# Altium PCB PCB_RP2040.pcbdoc
Units mil, origin at the board's own origin, x right, y up, seen from the top; angles counter-clockwise.
Board outline 2663.55 x 1404.85 mil, 2 copper layers (Top Layer, Bottom Layer); 51 components, 59 nets, 229 pads, 50 vias.
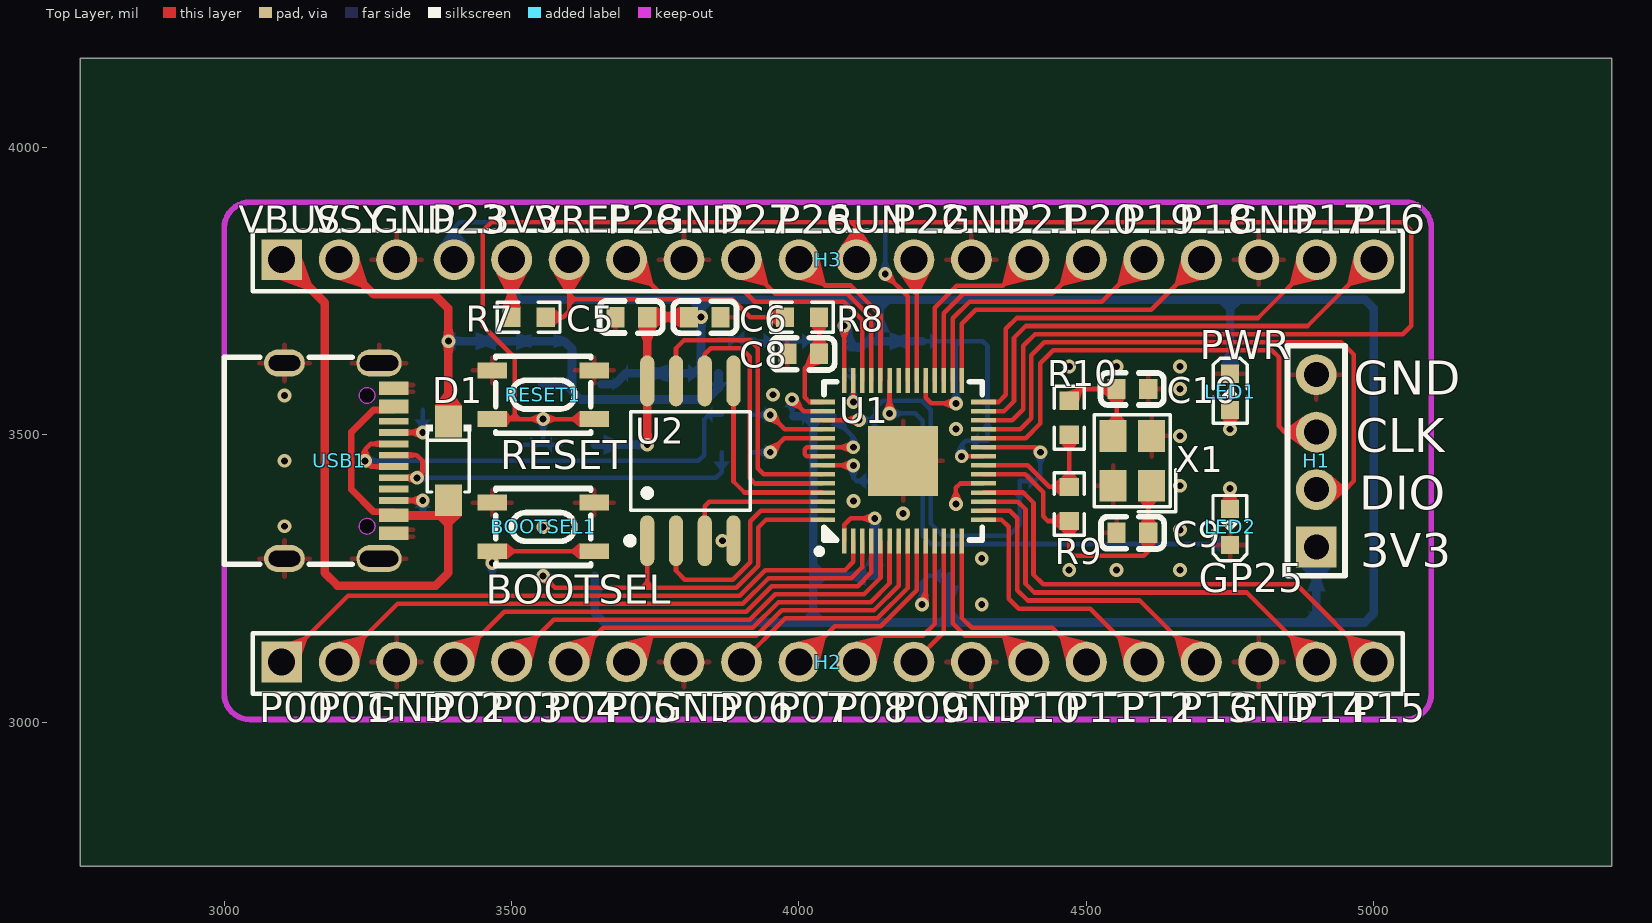
[diagram p0: Top Layer view]
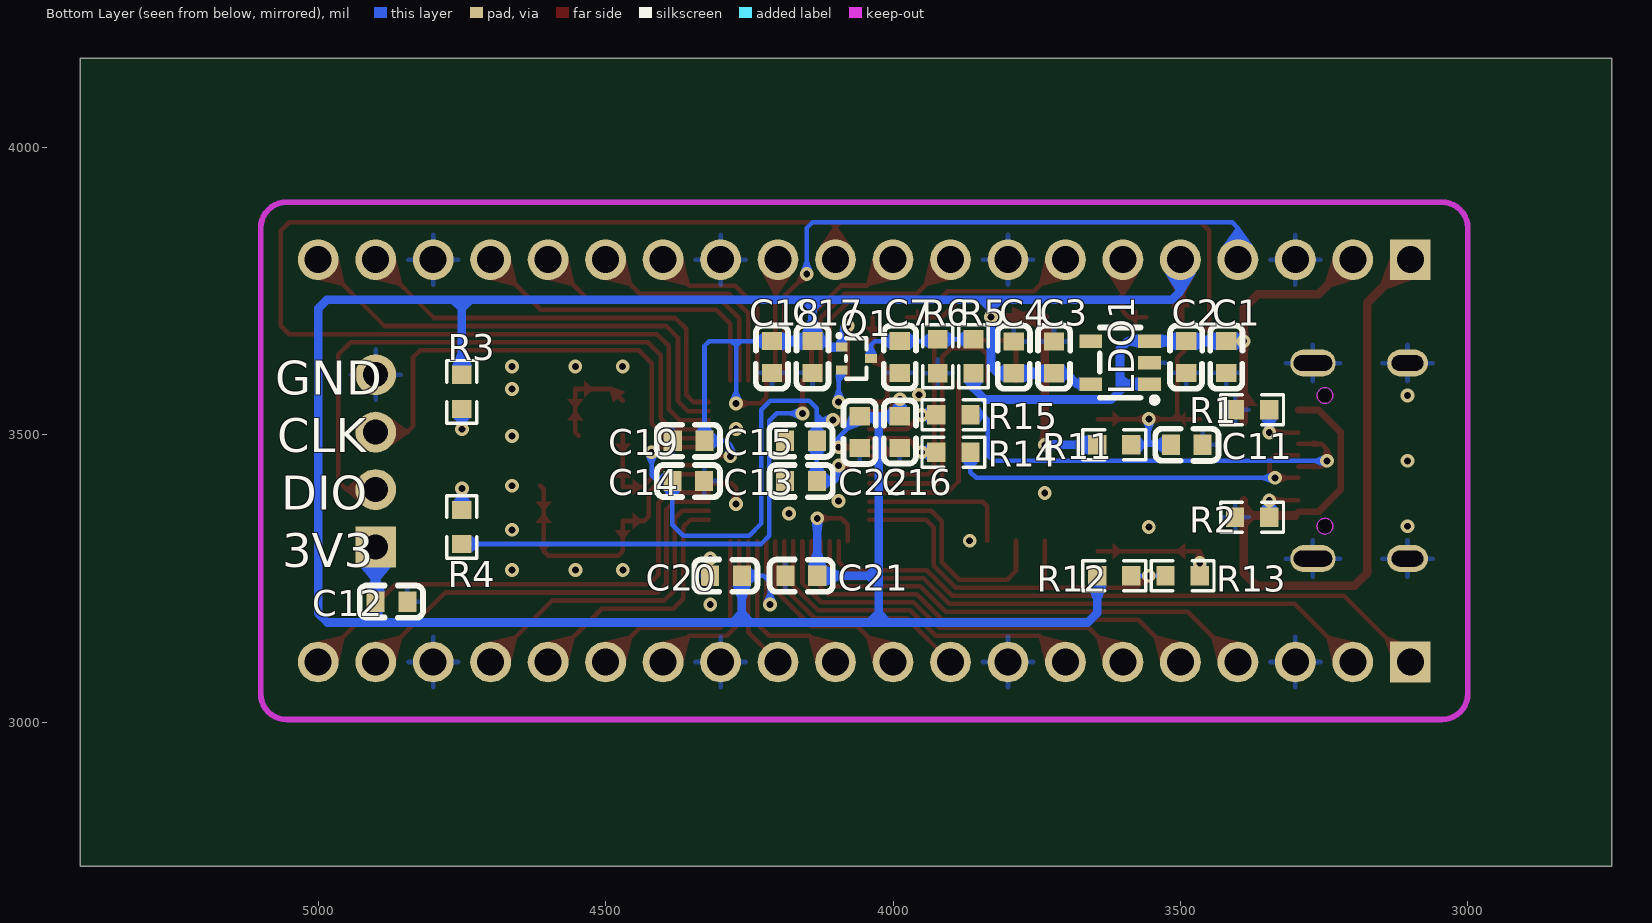
[diagram p1: Bottom Layer view, seen from below]

## Layer stack, top to bottom
Top Layer: signal copper (thickness not stored)
Dielectric: dielectric 12.6, FR-4, Dk 4.8
Bottom Layer: signal copper (thickness not stored)

## Board outline
5413.55,2750 2750,2750 2750,4154.85 5413.55,4154.85

## Design rules (kind name [scope] priority, off if disabled: settings)
BoardOutlineClearance safeClearance [All] p0: genericclearance=10 ignorepadtopadclearanceinfootprint=FALSE except(0: Arc-SplitContinuation Track-SplitContinuation SMDPad-SplitContinuation THPad-SplitContinuation Via-SplitContinuation Fill-SplitContinuation Poly-SplitContinuation Region-SplitContinuation Text-SplitContinuation; 6: Track-CutoutEdge SMDPad-CutoutEdge THPad-CutoutEdge Via-CutoutEdge Fill-CutoutEdge Region-CutoutEdge; 11.8: Track-OutlineEdge SMDPad-OutlineEdge THPad-OutlineEdge Via-OutlineEdge Fill-OutlineEdge Region-OutlineEdge Poly-OutlineEdge Text-OutlineEdge)
Clearance safeClearance [(InNet('3V3') OR InNet('GPIO0') OR InNet('GPIO1') OR InNet('GPIO2') OR InNet('GPIO3') OR InNet('GPIO4') OR InNet('GPIO5') OR InNet('GPIO6') OR InNet('GPIO7') OR InNet('GPIO8') OR InNet('GPIO9') OR InNet('GPIO10') OR InNet('GPIO11') OR InNet('GPIO12') OR InNet('GPIO13') OR InNet('GPIO14') OR InNet('GPIO15') OR InNet('GND') OR InNet('XIN') OR InNet('XOUT') OR InNet('1V1') OR InNet('SWCLK') OR InNet('RUN') OR InNet('GPIO16') OR InNet('GPIO17') OR InNet('GPIO18') OR InNet('GPIO19') OR InNet('GPIO20') OR InNet('GPIO21') OR InNet('GPIO22') OR InNet('GPIO23') OR InNet('GPIO24') OR InNet('GPIO25') OR InNet('GPIO26_ADC0') OR InNet('GPIO27_ADC1') OR InNet('GPIO28_ADC2') OR InNet('GPIO29_ADC3') OR InNet('QSPI_SD3') OR InNet('QSPI_SCLK') OR InNet('QSPI_SD0') OR InNet('QSPI_SD2') OR InNet('QSPI_SD1') OR InNet('QSPI_SS') OR InNet('ADC_VREF') OR InNet('VSYS') OR InNet('VBUS') OR InNet('SWDIO') OR InNet('ADC_AVDD') OR InNet('$1N7808') OR InNet('$1N27491') OR InNet('$1N12428') OR InNet('$1N4514') OR InNet('$1N30099') OR InNet('$1N43649') OR InNet('$1N43452') OR InNet('USB_DN') OR InNet('USB_DP') OR InNet('CC1') OR InNet('CC2'))] p1: gap=7 ignorepadtopadclearanceinfootprint=FALSE except(6: Track-Track Track-SMDPad SMDPad-SMDPad Track-THPad SMDPad-THPad THPad-THPad Track-Via SMDPad-Via THPad-Via Via-Via Track-Fill SMDPad-Fill THPad-Fill Via-Fill Fill-Fill Track-Region SMDPad-Region THPad-Region Via-Region Fill-Region Region-Region Track-Poly SMDPad-Poly THPad-Poly Via-Poly Fill-Poly Region-Poly Poly-Poly Track-Text SMDPad-Text THPad-Text Via-Text Fill-Text Region-Text Poly-Text Text-Text Track-Hole SMDPad-Hole THPad-Hole Via-Hole Fill-Hole Region-Hole Poly-Hole Text-Hole; 11.8: Track-Sheet SMDPad-Sheet THPad-Sheet Via-Sheet Fill-Sheet Region-Sheet Poly-Sheet Text-Sheet Sheet-Hole)
DiffPairsRouting differentialPair [All] p1: maxuncoupledlength=10 minlimit=6 maxlimit=6 mostfreqgap=6 toplayer_minwidth=5 toplayer_prefwidth=10 toplayer_maxwidth=100 bottomlayer_minwidth=5 bottomlayer_prefwidth=10 bottomlayer_maxwidth=100
PasteMaskExpansion pasteMaskExpansion [All] p1: expansion=0
PlaneConnect innerPlane [All] p1: planeconnectstyle=Relief reliefexpansion=20 reliefentries=4 reliefconductorwidth=10 reliefairgap=10
PolygonConnect copperRegion [All] p1: connectstyle=Relief reliefentries=4 reliefconductorwidth=8 polygonreliefangle="90 Angle" airgapwidth=8
RoutingVias viaSize [All] p1: viastyle="Through Hole" holewidth=12.0078 minholewidth=11.811 maxholewidth=236.2204 width=24.0158 minwidth=19.685 maxwidth=393.7008
SolderMaskExpansion solderMaskExpansion [All] p1: useseparateexpansions=TRUE expansion=2 expansionbottom=2
Width trackWidth [All] p1: maxlimit=100 minlimit=5 preferedwidth=10

## Components (designator, comment, footprint, x,y, rotation, side; value= is the part's Value field where it differs from the comment)
BOOTSEL1 "PTS815SJK250SMTRLFS" SW-SMD_4P-L4.2-W3.3-P2.15-LS5.1 3555,3339.85 r0 top
C1 "CL10A225KO8NNNC" C0603 3420,3635.46 r90 bottom
C2 "0603B104K500NT" C0603 3490,3635.46 r90 bottom
C3 "CL10A225KO8NNNC" C0603 3720,3634.85 r270 bottom
C4 "0603B104K500NT" C0603 3790,3634.85 r270 bottom
C5 "0603B104K500NT" C0603 3708.4,3704.85 r0 top
C6 "CL10A225KO8NNNC" C0603 3836,3704.85 r180 top
C7 "0603B104K500NT" C0603 3988,3635.46 r90 bottom
C8 "CL10A225KO8NNNC" C0603 4007.4,3640.85 r0 top
C9 "CC0603JRNPO9BN150" C0603 4580,3329.85 r180 top
C10 "CC0603JRNPO9BN150" C0603 4580,3579.85 r0 top
C11 "0603B104K500NT" C0603 3488.91,3482.85 r0 bottom
C12 "0603B104K500NT" C0603 4872.4,3209.85 r180 bottom
C13 "0603B104K500NT" C0603 4160,3419.85 r0 bottom
C14 "0603B104K500NT" C0603 4356.17,3419.85 r0 bottom
C15 "CL10A225KO8NNNC" C0603 4160,3489.64 r180 bottom
C16 "CL10A225KO8NNNC" C0603 3988,3504.85 r270 bottom
C17 "0603B104K500NT" C0603 4140,3635.46 r90 bottom
C18 "0603B104K500NT" C0603 4210.5,3635.46 r90 bottom
C19 "0603B104K500NT" C0603 4355.56,3489.64 r180 bottom
C20 "0603B104K500NT" C0603 4290.56,3254.85 r180 bottom
C21 "0603B104K500NT" C0603 4159.39,3254.85 r180 bottom
C22 "0603B104K500NT" C0603 4058,3504.85 r90 bottom
D1 "1N4007W_C108803" SOD-123FL_L2.7-W1.8-LS3.8-RD 3390,3454.85 r270 top
H1 "DZ254W-11-04-65" hdr-th_4p-p2.54-h-m-w10.3 4900,3454.85 r90 top
H2 "12251120CNG0S115005" HDR-TH_20P-P2.54-V-M-1 4050,3104.85 r0 top
H3 "12251120CNG0S115005" HDR-TH_20P-P2.54-V-M-1 4050,3804.85 r0 top
LDO1 "ME6211C33M5G-N" SOT-23-5_L3.0-W1.7-P0.95-LS2.8-BR 3605,3625.65 r180 bottom
LED1 "NCD0603R1_C84263" LED0603-RD_RED 4750,3574.85 r270 top
LED2 "19-217/BHC-ZL1M2RY/3T" led0603-r-rd_blue 4750,3339.85 r90 top
Q1 "DMG1012T-7" SOT-523-3_L1.6-W0.8-P1.00-LS1.6-BR 4063.9,3632.85 r0 bottom
R1 "RC0603FR-075K1L" R0603 3375.2,3543.43 r180 bottom
R2 "RC0603FR-075K1L" R0603 3375.2,3356.42 r180 bottom
R3 "RC0603FR-071KL" R0603 4750,3574.85 r90 bottom
R4 "RC0603FR-07470RL" R0603 4750,3339.85 r270 bottom
R5 "RC0603FR-07200KL" R0603 3860,3636.75 r270 bottom
R6 "RC0603FR-07100KL" R0603 3922.03,3636.75 r90 bottom
R7 "RC0603FR-07200RL" R0603 3529.7,3704.85 r180 top
R8 "RC0603FR-071RL" R0603 4005.3,3704.85 r180 top
R9 "RC0603FR-071KL" R0603 4470,3379.85 r90 top
R10 "RC0603FR-071KL" R0603 4470,3529.85 r270 top
R11 "0603WAF1002T5E" R0603 3615,3482.85 r0 bottom
R12 "RC0603FR-071KL" R0603 3615,3254.85 r180 bottom
R13 "RC0603FR-071KL" R0603 3496.1,3254.85 r0 bottom
R14 "0603WAF270JT5E" R0603 3895,3469.85 r180 bottom
R15 "0603WAF270JT5E" R0603 3895,3534.85 r180 bottom
RESET1 "PTS815SJK250SMTRLFS" SW-SMD_4P-L4.2-W3.3-P2.15-LS5.1 3555,3569.85 r0 top
U1 "RP2040_C2040" LQFN-56_L7.0-W7.0-P0.4-EP 4181.11,3454.85 r90 top locked
U2 "W25Q128JVSIQ" SOIC-8_L5.3-W5.3-P1.27-LS8.0-BL 3811.03,3454.85 r0 top
USB1 "KH-TYPE-C-16P" USB-C-SMD_KH-TYPE-C-16P 3200,3454.85 r270 top
X1 "XC32M4-12.000-F10NNFT" CRYSTAL-SMD_4P-L3.2-W2.5-BL 4580,3454.85 r90 top

## Footprints (in the part's own frame and the unit in brackets; to place one, negate y for a bottom-side part, rotate by r counter-clockwise, add the part's x,y. Pads: shape width x height; smd on the part's side, far side on the other; paste and mask are expansions set on the pad)
C0603 [mm]
  rect 0.8x0.9 smd: 1(-0.7,0) 2(0.7,0)
  silkscreen extent -1.41,-0.71 1.39,0.72
CRYSTAL-SMD_4P-L3.2-W2.5-BL [mm]
  rect 1.4x1.2 smd: 1(-1.1,-0.85) 2(1.1,-0.85) 3(1.1,0.85) 4(-1.1,0.85)
  silkscreen extent -2.26,-1.91 2.03,1.68
hdr-th_4p-p2.54-h-m-w10.3 [mm]
  rect 1.8x1.8 hole 1.1: 1(-3.81,0)
  round 1.8 hole 1.1: 2(-1.27,0) 3(1.27,0) 4(3.81,0)
  silkscreen extent -5.08,-1.27 5.08,1.27
HDR-TH_20P-P2.54-V-M-1 [mil]
  rect 70.9x70.9 hole 47.2: 1(-950,0)
  round 70.9 hole 47.2: 2(-850,0) 3(-750,0) 4(-650,0) 5(-550,0) 6(-450,0) 7(-350,0) 8(-250,0) 9(-150,0) 10(-50,0) 11(50,0) 12(150,0) 13(250,0) 14(350,0) 15(450,0) 16(550,0) 17(650,0) 18(750,0) 19(850,0) 20(950,0)
  silkscreen extent -1000,-55 1000,50
led0603-r-rd_blue [mm]
  rect 0.8x0.8 smd: 1(-0.8,-0.003) 2(0.8,0.003)
  silkscreen extent -1.49,-0.75 1.39,0.76
LED0603-RD_RED [mm]
  rect 0.8x0.8 smd: 1(-0.8,-0.003) 2(0.8,0.003)
  silkscreen extent -1.49,-0.75 1.39,0.76
LQFN-56_L7.0-W7.0-P0.4-EP [mm]
  rect 1.1x0.2 smd: 1(-3.55,2.6) 2(-3.55,2.2) 3(-3.55,1.8) 4(-3.55,1.4) 5(-3.55,1) 6(-3.55,0.6) 7(-3.55,0.2) 8(-3.55,-0.2) 9(-3.55,-0.6) 10(-3.55,-1) 11(-3.55,-1.4) 12(-3.55,-1.8) 13(-3.55,-2.2) 14(-3.55,-2.6) 29(3.55,-2.6) 30(3.55,-2.2) 31(3.55,-1.8) 32(3.55,-1.4) 33(3.55,-1) 34(3.55,-0.6) 35(3.55,-0.2) 36(3.55,0.2) 37(3.55,0.6) 38(3.55,1) 39(3.55,1.4) 40(3.55,1.8) 41(3.55,2.2) 42(3.55,2.6)
  rect 0.2x1.1 smd: 15(-2.6,-3.55) 16(-2.2,-3.55) 17(-1.8,-3.55) 18(-1.4,-3.55) 19(-1,-3.55) 20(-0.6,-3.55) 21(-0.2,-3.55) 22(0.2,-3.55) 23(0.6,-3.55) 24(1,-3.55) 25(1.4,-3.55) 26(1.8,-3.55) 27(2.2,-3.55) 28(2.6,-3.55) 43(2.6,3.55) 44(2.2,3.55) 45(1.8,3.55) 46(1.4,3.55) 47(1,3.55) 48(0.6,3.55) 49(0.2,3.55) 50(-0.2,3.55) 51(-0.6,3.55) 52(-1,3.55) 53(-1.4,3.55) 54(-1.8,3.55) 55(-2.2,3.55) 56(-2.6,3.55)
  rect 3.1x3.1 smd: 57(0,0)
  silkscreen extent -4.13,-3.5 3.5,3.83
R0603 [mil]
  rect 31.75x34.02 smd: 1(-29.66,0) 2(29.66,0)
  silkscreen extent -55,-26 55,26
SOD-123FL_L2.7-W1.8-LS3.8-RD [mil]
  rect 55.1x47.2 smd: 1(-68.3,0) 2(68.3,0)
  silkscreen extent -63,-40 54,39
SOIC-8_L5.3-W5.3-P1.27-LS8.0-BL [mm]
  oval 0.63x2.25 smd: 1(-1.905,-3.53) 2(-0.635,-3.53) 3(0.635,-3.53) 4(1.905,-3.53) 5(1.905,3.53) 6(0.635,3.53) 7(-0.635,3.53) 8(-1.905,3.53)
  silkscreen extent -2.82,-3.68 2.64,2.18
SOT-23-5_L3.0-W1.7-P0.95-LS2.8-BR [mm]
  rect 1x0.6 smd: 1(1.3,-0.95) 2(1.3,0) 3(1.3,0.95) 4(-1.3,0.95) 5(-1.3,-0.95)
  silkscreen extent -0.9,-1.78 1.65,1.55
SOT-523-3_L1.6-W0.8-P1.00-LS1.6-BR [mm]
  rect 0.51x0.4 smd: 1(0.65,-0.5) 2(0.65,0.5) 3(-0.65,0)
  silkscreen extent -0.45,-1.08 0.83,0.9
SW-SMD_4P-L4.2-W3.3-P2.15-LS5.1 [mil]
  rect 51.2x27.6 smd: 1(-88.6,42.3) 2(88.6,42.3) 3(-88.6,-42.3) 4(88.6,-42.3)
  silkscreen extent -83,-67 83,67
USB-C-SMD_KH-TYPE-C-16P [mm]
  oval 1.2x2 hole 0.7 slot 1.7 at 90 deg: 1(-4.32,1.765) 2(4.32,1.765)
  oval 1.2x1.8 hole 0.7 slot 1.4 at 90 deg: 3(-4.32,-2.415) 4(4.32,-2.415)
  rect 0.3x1.3 smd: A1(-3.35,2.415) A4(-2.55,2.415) A5(-1.25,2.415) A6(-0.25,2.415) A7(0.25,2.415) A8(1.25,2.415) A9(2.55,2.415) A12(3.35,2.415) B1(3.05,2.415) B4(2.25,2.415) B5(1.75,2.415) B6(0.75,2.415) B7(-0.75,2.415) B8(-1.75,2.415) B9(-2.25,2.415) B12(-3.05,2.415)
  Board Outline Layer circle w0.005: c-2.89,1.235 r0.35
  Board Outline Layer circle w0.005: c2.89,1.235 r0.35
  Board Outline Layer region: -2.89,1.585 -2.738,1.55 -2.616,1.453 -2.549,1.313 -2.549,1.157 -2.616,1.017 -2.738,0.92 -2.89,0.885 -2.89,0.885 -3.042,0.92 -3.164,1.017 -3.231,1.157 -3.231,1.313 -3.164,1.453 -3.042,1.55 -2.89,1.585
  Board Outline Layer region: 2.89,1.585 3.042,1.55 3.164,1.453 3.231,1.313 3.231,1.157 3.164,1.017 3.042,0.92 2.89,0.885 2.89,0.885 2.738,0.92 2.616,1.017 2.549,1.157 2.549,1.313 2.616,1.453 2.738,1.55 2.89,1.585
  Multi-Layer board cut-out: -2.89,1.585 -2.738,1.55 -2.616,1.453 -2.549,1.313 -2.549,1.157 -2.616,1.017 -2.738,0.92 -2.89,0.885 -2.89,0.885 -3.042,0.92 -3.164,1.017 -3.231,1.157 -3.231,1.313 -3.164,1.453 -3.042,1.55 -2.89,1.585
  Multi-Layer board cut-out: 2.89,1.585 3.042,1.55 3.164,1.453 3.231,1.313 3.231,1.157 3.164,1.017 3.042,0.92 2.89,0.885 2.89,0.885 2.738,0.92 2.616,1.017 2.549,1.157 2.549,1.313 2.616,1.453 2.738,1.55 2.89,1.585
  silkscreen extent -4.57,-5.08 4.57,0.57

## Via types
v1: diameter 24.02, hole 12.01, Top Layer to Bottom Layer, 50 vias

## Nets (pads, with @x,y where several pads share a name; then routed paths per layer and width w, separated by ;. In a path a pad name is that pad's centre, name@x,y a point inside that pad or via, vN(x,y) a via of type N, cw(c..) or ccw(c..) an arc to the next point about the centre after c; other vN are vias at no path point)
1V1: C13.1 C14.2 C15.2 U1.23 U1.45 U1.50 | length 1076
  Top Layer w8: U1.50 v1@4094.47,3446.97 ; U1.45@4041.38,3525.75 v1(4104.49,3525.75) ; U1.23 4411.38,3478.47 v1(4420,3469.85)
  Bottom Layer w8: v1(4094.49,3446.95) 4094.49,3425.36 4100,3419.85 C13.1@4122.44,3419.85 ; v1(4104.49,3525.75) 4123.34,3525.75 ; C13.1 C15.2 4132.44,3516.65 ; v1(4420,3469.85) 4420,3429.85 4410,3419.85 C14.2 4383.73,3343.57 4365,3324.85 4250,3324.85 4229,3345.86 4229,3543.86 4213.47,3559.38 4145.66,3559.38 4132.44,3546.16 4132.44,3534.85 ; 4123.34,3525.75 4132.44,3534.85 ; 4123.34,3525.75 4132.44,3516.65 ; 4132.44,3516.65 4132.44,3534.85
3V3: C3.2 C4.2 C5.2 C6.2 C12.1 C16.1 C17.2 C18.2 C19.2 C20.2 C21.2 C22.2 H1.1 H3.5 LDO1.5 Q1.1 R3.2 R7.2 R11.2 R12.1 U1.1 U1.10 U1.22 U1.33 U1.42 U1.44 U1.48 U1.49 U2.8 | length 7030.2
  Top Layer w8: v1(3988,3561.94) 4008.48,3541.46 U1.44 ; U1.49 4013.62,3462.72 4010,3466.34 4010,3474.85 4013.62,3478.47 U1.48 v1@4094.47,3478.47 ; U1.1 4078.74,3343.59 4090,3354.85 v1(4131.83,3354.85) ; U1.42 v1(4078.7,3689.85) ; v1(4214,3204.85) 4220.47,3211.32 U1.10 ; U1.33 4220.47,3564.38 4230,3554.85 v1(4273,3554.85) ; v1(4283,3462.72) U1.22
  Top Layer w15: R7.2@3500.04,3694.85 H3.5 ; C5.2 C6.2 ; v1@3736.03,3482.87 U2.8 C5.2@3736.03,3694.78
  Bottom Layer w8: C16.1 v1(3988,3561.94) ; C22.2 4094.49,3495.92 v1(4094.49,3478.45) ; v1(4078.7,3689.85) 4089.49,3679.06 Q1.1 ; v1(4214,3204.85) 4214,3243.85 4225,3254.85 C20.2 ; C18.2@4220.5,3663.02 4281.46,3663.02 ; 4264.55,3663.02 4273,3654.57 ; v1(4273,3554.85) 4273,3654.57 ; v1(4283,3462.72) 4283,3482.85 4289.79,3489.64 C19.2 4328,3654.86 4319.83,3663.02 4281.46,3663.02 ; 4273,3654.57 4281.46,3663.02
  Bottom Layer w15: H3.5 3500,3749.85 3515,3734.85 3813.98,3734.85 ; R12.1 3644.66,3190.19 3661.22,3173.63 4008.79,3173.63 ; R11.2 v1(3736,3482.85) ; LDO1.5 3679.75,3588.25 3698.79,3607.29 C3.2 C4.2 3817.44,3607.29 3829.5,3619.34 v1(3829.49,3704.85) 3829.49,3719.34 ; C16.1@3990,3532.41 4010.73,3532.41 ; C22.2 4039.28,3532.41 ; Q1.1 4107.69,3652.53 4118.17,3663.02 C17.2 4140,3719.85 ; v1(4131.83,3354.85) C21.2 4042.39,3254.85 ; C17.2@4145,3663.02 C18.2@4215.5,3663.02 ; C20.2 4263,3189.67 ; 4279.03,3173.63 4263,3189.67 ; R3.2 4750,3719.85 ; H1.1 C12.1 4899.96,3189.81 ; 4916.14,3173.63 4899.96,3189.81 ; 3813.98,3734.85 3829.49,3719.34 ; 3813.98,3734.85 3845,3734.85 ; 3829.49,3719.34 3845,3734.85 ; 3845,3734.85 4125,3734.85 ; 4008.79,3173.63 4025,3189.85 ; 4008.79,3173.63 4041.22,3173.63 ; 4010.73,3532.41 4025,3518.13 ; 4010.73,3532.41 4039.28,3532.41 ; 4025,3189.85 4041.22,3173.63 ; 4025,3189.85 4025,3237.46 ; 4025,3237.46 4042.39,3254.85 ; 4025,3237.46 4025,3272.23 ; 4025,3272.23 4042.39,3254.85 ; 4025,3272.23 4025,3518.13 ; 4025,3518.13 4039.28,3532.41 ; 4041.22,3173.63 4246.96,3173.63 ; 4125,3734.85 4140,3719.85 ; 4125,3734.85 4155,3734.85 ; 4140,3719.85 4155,3734.85 ; 4155,3734.85 4735,3734.85 ; 4246.96,3173.63 4263,3189.67 ; 4246.96,3173.63 4883.79,3173.63 ; 4735,3734.85 4750,3719.85 ; 4735,3734.85 4765,3734.85 ; 4750,3719.85 4765,3734.85 ; 4765,3734.85 4985,3734.85 5000,3719.85 5000,3189.85 4983.79,3173.63 4883.79,3173.63 ; 4883.79,3173.63 4899.96,3189.81
$1N4514: C10.1 R10.1 X1.3 | length 175
  Top Layer w8: R10.1 4490.34,3579.85 C10.1 4552.44,3504.06 X1.3
$1N7808: LED2.2 R4.1 | length 72.6
  Top Layer w8: LED2.2@4749.81,3371.39 v1(4749.81,3406.7)
  Bottom Layer w8: v1(4749.81,3406.7) 4749.81,3369.71 R4.1
$1N12428: BOOTSEL1.3 BOOTSEL1.4 R13.1 | length 219.9
  Top Layer w8: BOOTSEL1.3 BOOTSEL1.4 ; v1(3466.44,3277.35) BOOTSEL1.3
  Bottom Layer w8: R13.1 v1(3466.44,3277.35)
$1N27491: LED1.2 R3.1 | length 68.9
  Top Layer w8: v1(4750,3509.85) 4750.14,3509.99 LED1.2
  Bottom Layer w8: v1(4750,3509.85) R3.1
$1N30099: C7.2 Q1.3 R5.1 R6.2 | length 206.1
  Bottom Layer w8: R5.1 R6.2 3925.42,3663.02 C7.2 4031.83,3663.02 4038.31,3656.54 Q1.3
$1N43452: R14.1 U1.47 | length 136.8
  Top Layer w8: v1(3950,3469.85) 3974.37,3494.22 U1.47
  Bottom Layer w8: R14.1@3914.66,3469.85 v1(3950,3469.85)
$1N43649: R15.1 U1.46 | length 137
  Top Layer w8: v1(3950,3534.85) 3974.88,3509.97 U1.46
  Bottom Layer w8: R15.1@3914.66,3534.85 v1(3950,3534.85)
ADC_AVDD: C8.2 R8.1 U1.43 | length 184.6
  Top Layer w8: R8.1 C8.2 4010.01,3615.9 4010.01,3565.21 4018.01,3557.21 U1.43
ADC_VREF: H3.6 R7.1 R8.2 | length 539.7
  Top Layer w8: R7.1 3590,3704.85 3600,3714.85 3600,3726.85 ; H3.6 3600,3744.85 ; R8.2 3915,3704.85 3884,3735.85 3609,3735.85 ; 3600,3726.85 3609,3735.85 ; 3600,3726.85 3600,3744.85 ; 3600,3744.85 3609,3735.85
CC1: R1.2 USB1.A5 | length 89.7
  Top Layer w8: USB1.A5 v1(3345.47,3504.06)
  Bottom Layer w8: v1(3345.47,3504.06) R1.2
CC2: R2.2 USB1.B5 | length 79.9
  Top Layer w8: USB1.B5@3295.09,3385.95 v1(3345.48,3385.95)
  Bottom Layer w8: R2.2 v1@3345.54,3385.89
GND: BOOTSEL1.1 BOOTSEL1.2 C1.1 C2.1 C3.1 C4.1 C5.1 C6.1 C7.1 C8.1 C9.2 C10.2 C11.1 C12.2 C13.2 C14.1 C15.1 C16.2 C17.1 C18.1 C19.1 C20.1 C21.1 C22.1 H1.4 H2.3 H2.8 H2.13 H2.18 H3.3 H3.8 H3.13 H3.18 LDO1.2 LED1.1 LED2.1 R1.1 R2.1 R6.1 RESET1.1 RESET1.2 U1.19 U1.57 U2.4 USB1.1 USB1.2 USB1.3 USB1.4 USB1.A1 USB1.A12 USB1.B1 USB1.B12 X1.2 X1.4 | length 79
  Top Layer w8: v1(4273,3379.85) 4273,3407.85 4280.63,3415.48 U1.19
  other v1: 4317.94,3204.85 4470,3264.85 4552.44,3264.85 4663.03,3264.85 4317.94,3284.85 3866.6,3315.87 4663.03,3334.85 3555,3339.85 3104.92,3341.07 4181.11,3363.05 4095,3384.85 3736.03,3398.79 4663.03,3411.54 3104.92,3454.85 4663.03,3498.16 4273,3510.38 3104.92,3568.63 3955,3569.85 4663.03,3579.95 4470.28,3619.21 4552.62,3619.21 4663.03,3619.21
GPIO0: H2.1 U1.2 | length 1102.5
  Top Layer w8: H2.1 3215.45,3220.3 3896.66,3220.3 3941.21,3264.85 4080,3264.85 4094.49,3279.34 U1.2
GPIO1: H2.2 U1.3 | length 1023.7
  Top Layer w8: H2.2 3301.45,3206.3 3902.46,3206.3 3947.01,3250.85 4091,3250.85 4110.24,3270.09 U1.3
GPIO2: H2.4 U1.4 | length 844.8
  Top Layer w8: H2.4 3487.45,3192.3 3908.26,3192.3 3952.81,3236.85 4102,3236.85 4125.99,3260.84 U1.4
GPIO3: H2.5 U1.5 | length 766
  Top Layer w8: H2.5 3573.45,3178.3 3914.06,3178.3 3958.61,3222.85 4113,3222.85 4141.73,3251.58 U1.5
GPIO4: H2.6 U1.6 | length 687.5
  Top Layer w8: H2.6 3659.45,3164.3 3919.86,3164.3 3964.41,3208.85 4124.61,3208.85 4157.48,3241.72 U1.6
GPIO5: H2.7 U1.7 | length 605.7
  Top Layer w8: H2.7 3745.45,3150.3 3925.66,3150.3 3970.2,3194.85 4130.41,3194.85 4173.23,3237.67 U1.7
GPIO6: H2.9 U1.8 | length 423.8
  Top Layer w8: H2.9 3976,3180.85 4136.2,3180.85 4188.98,3233.62 U1.8
GPIO7: H2.10 U1.9 | length 341.9
  Top Layer w8: H2.10 4062,3166.85 4142,3166.85 4204.73,3229.58 U1.9
GPIO8: H2.11 U1.11 | length 307.7
  Top Layer w8: H2.11 4145.45,3150.3 4215.45,3150.3 4236.22,3171.07 U1.11
GPIO9: H2.12 U1.12 | length 231.8
  Top Layer w8: H2.12 4251.97,3156.82 U1.12
GPIO10: H2.14 U1.13 | length 303.1
  Top Layer w8: U1.13 4267.72,3172.13 4289.55,3150.3 4354.55,3150.3 H2.14
GPIO11: H2.15 U1.14 | length 381.9
  Top Layer w8: U1.14 4283.47,3181.38 4300.55,3164.3 4440.55,3164.3 H2.15
GPIO12: H2.16 U1.15 | length 454.9
  Top Layer w8: U1.15 4352.36,3352.49 4365,3339.85 4365,3214.85 4382.01,3197.84 4507.01,3197.84 H2.16
GPIO13: H2.17 U1.16 | length 561.5
  Top Layer w8: U1.16 4366.62,3368.23 4380,3354.85 4380,3229.85 4398.01,3211.84 4593.01,3211.84 H2.17
GPIO14: H2.19 U1.17 | length 770.9
  Top Layer w8: U1.17 4380.87,3383.98 4394,3370.85 4394,3240.85 4409.01,3225.84 4779.01,3225.84 H2.19
GPIO15: H2.20 U1.18 | length 874.5
  Top Layer w8: U1.18 4390.12,3399.73 4408,3381.85 4408,3256.85 4425.01,3239.84 4865.01,3239.84 H2.20
GPIO16: H3.20 U1.27 | length 852.7
  Top Layer w8: U1.27 4356.61,3541.46 4374,3558.85 4374,3668.85 4394.55,3689.4 4884.55,3689.4 H3.20
GPIO17: H3.19 U1.28 | length 749.1
  Top Layer w8: U1.28 4347.36,3557.21 4360,3569.85 4360,3684.85 4378.55,3703.4 4798.55,3703.4 H3.19
GPIO18: H3.17 U1.29 | length 561.4
  Top Layer w8: U1.29 4283.47,3693.32 4307.55,3717.4 4612.55,3717.4 H3.17
GPIO19: H3.16 U1.30 | length 482.6
  Top Layer w8: U1.30 4267.72,3702.57 4296.55,3731.4 4526.55,3731.4 H3.16
GPIO20: H3.15 U1.31 | length 403.8
  Top Layer w8: U1.31 4251.97,3711.82 4285.55,3745.4 4440.55,3745.4 H3.15
GPIO21: H3.14 U1.32 | length 324.9
  Top Layer w8: U1.32 4236.22,3721.07 4274.55,3759.4 4354.55,3759.4 H3.14
GPIO22: H3.12 U1.34 | length 212.2
  Top Layer w8: H3.12 4204.73,3800.12 U1.34
GPIO23: H3.4 U1.35 | length 1094.7
  Top Layer w8: v1(4150,3779.85) 4188.98,3740.87 U1.35
  Bottom Layer w8: H3.4 3400,3859.85 3410,3869.85 4140,3869.85 4150,3859.85 v1(4150,3779.85)
GPIO24: U1.36
GPIO25: R4.2 U1.37 | length 861
  Top Layer w8: v1(4157.48,3537.37) U1.37
  Bottom Layer w8: v1(4157.48,3537.37) 4202.48,3537.37 4215,3524.86 4215,3324.86 4229.66,3310.19 R4.2
GPIO26_ADC0: H3.10 U1.38 | length 295.2
  Top Layer w8: H3.10 4045,3759.86 4089.8,3759.86 4141.73,3707.92 U1.38
GPIO27_ADC1: H3.9 U1.39 | length 377.1
  Top Layer w8: H3.9 3959,3745.86 4084,3745.86 4125.99,3703.86 U1.39
GPIO28_ADC2: H3.7 U1.40 | length 558.9
  Top Layer w8: H3.7 3755,3749.85 3905,3749.85 3923,3731.86 4078.2,3731.86 4110.24,3699.81 U1.40
GPIO29_ADC3: Q1.2 U1.41 | length 97.1
  Top Layer w8: v1@4094.49,3555.36 U1.41
  Bottom Layer w8: Q1.2 4094.49,3608.17 v1(4094.49,3557.37)
QSPI_SCLK: U1.52 U2.6 | length 477.4
  Top Layer w8: U2.6 3836.03,3640.12 3846.76,3650.85 3899,3650.85 3914,3635.86 3914,3424.49 3923,3415.48 U1.52
QSPI_SD0: U1.53 U2.5 | length 338.2
  Top Layer w8: U2.5 3886.03,3418.82 3905.12,3399.73 U1.53
QSPI_SD1: U1.55 U2.2 | length 405.4
  Top Layer w8: U2.2 3786.03,3263.82 3801.55,3248.3 3885.06,3248.3 3915,3278.24 3915,3349.85 3933.38,3368.23 U1.55
QSPI_SD2: U1.54 U2.3 | length 268.7
  Top Layer w8: U2.3 3836.03,3375.87 3844.13,3383.98 U1.54
QSPI_SD3: U1.51 U2.7 | length 537.9
  Top Layer w8: U2.7 3786.03,3650.87 3800,3664.85 3915,3664.85 3928,3651.86 3928,3441.86 3938.62,3431.23 U1.51
QSPI_SS: R12.2 R13.2 U1.56 U2.1 | length 740.5
  Top Layer w8: v1(3555,3254.85) 3575.55,3234.3 3726.95,3234.3 ; U2.1 3736.03,3243.38 ; U1.56 3942.64,3352.49 3929,3338.85 3929,3272.44 3890.86,3234.3 3745.1,3234.3 ; 3726.95,3234.3 3736.03,3243.38 ; 3726.95,3234.3 3745.1,3234.3 ; 3736.03,3243.38 3745.1,3234.3
  Bottom Layer w8: R13.2 R12.2
RUN: C11.2 H3.11 R11.1 RESET1.3 RESET1.4 U1.26 | length 3420
  Top Layer w8: RESET1.3 3497.7,3527.55 ; 3513.7,3527.55 3505.7,3535.55 ; RESET1.4 v1(3555,3527.55) 3497.7,3527.55 ; H3.11 4100,3860.85 ; U1.26 4370.86,3525.71 4390,3544.85 4390,3654.85 4410.55,3675.4 5050.55,3675.4 5065,3689.85 5065,3854.85 5050,3869.85 4109,3869.85 ; 3497.7,3527.55 3505.7,3535.55 ; 3505.7,3535.55 3505.7,3634.15 3450,3689.85 3450,3854.85 3465,3869.85 4091,3869.85 ; 4091,3869.85 4100,3860.85 ; 4091,3869.85 4109,3869.85 ; 4100,3860.85 4109,3869.85
  Bottom Layer w8: C11.2 3547.45,3482.85 ; v1(3555,3527.55) 3555,3490.4 ; R11.1 3562.56,3482.85 ; 3547.45,3482.85 3555,3490.4 ; 3547.45,3482.85 3562.56,3482.85 ; 3555,3490.4 3562.56,3482.85
SWCLK: H1.3 U1.24 | length 833.4
  Top Layer w8: U1.24 4394.37,3494.22 4420,3519.85 4420,3624.85 4442.55,3647.4 4822.45,3647.4 4835,3634.85 4835,3514.85 4845,3504.85 H1.3
SWDIO: H1.2 U1.25 | length 1071.4
  Top Layer w8: U1.25 4385.12,3509.97 4404,3528.85 4404,3638.85 4426.55,3661.4 4943.45,3661.4 4965,3639.85 4965,3419.85 4950,3404.85 H1.2
USB_DN: R15.2 USB1.A7 USB1.B7 | length 817.5
  Top Layer w8: USB1.A7 3255,3445.01 v1(3245.16,3454.85) 3245.16,3474.85 3254.69,3484.38 USB1.B7
  Bottom Layer w8: v1(3245.16,3454.85) 3825,3454.85 3835,3464.85 3835,3526.85 3843,3534.85 R15.2
USB_DP: R14.2 USB1.A6 USB1.B6 | length 696.5
  Top Layer w8: USB1.B6 v1(3335.47,3425.32) 3345,3434.85 3345,3454.85 3335.16,3464.69 USB1.A6
  Bottom Layer w8: v1(3335.47,3425.32) 3855.47,3425.32 3865.34,3435.19 R14.2
VBUS: D1.2 H3.1 USB1.A4 USB1.A9 USB1.B4 USB1.B9 | length 1332.6
  Top Layer w12: USB1.B4 3259.88,3366.27 3221.16,3404.99 3221.16,3504.7 3259.88,3543.43 USB1.B9
  Top Layer w15: H3.1 3175,3729.85 3175,3259.85 3197.05,3237.8 3367.95,3237.8 3390,3259.85 3390,3344.85 ; USB1.A9@3300.47,3359.85 D1.2@3375,3359.85 ; D1.2 D1.2@3390,3374.85 ; D1.2@3375,3359.85 D1.2@3390,3374.85 ; D1.2@3375,3359.85 3390,3344.85 ; 3390,3344.85 D1.2@3390,3374.85
VSYS: C1.2 C2.2 D1.1 H3.2 LDO1.1 LDO1.3 R5.2 | length 1083
  Top Layer w15: H3.2 3260,3744.85 3365,3744.85 3390,3719.85 v1(3390,3663.02) D1.1
  Bottom Layer w15: v1(3390,3663.02) C1.2 C2.2 ; C2.2 LDO1.3 3591.8,3663.05 3605,3649.85 3605,3599.85 ; LDO1.1 3593.4,3588.25 ; R5.2 3860,3581.48 3840.17,3561.65 3620,3561.65 3605,3576.65 ; 3593.4,3588.25 3605,3599.85 ; 3593.4,3588.25 3605,3576.65 ; 3605,3576.65 3605,3599.85
XIN: C9.1 R9.1 U1.20 X1.1 | length 519.9
  Top Layer w8: U1.20 4393.82,3431.23 4425,3400.05 4425,3358.19 4433,3350.19 R9.1 4470,3297.85 4478,3289.85 4599.56,3289.85 4607.56,3297.85 C9.1 4607.56,3405.63 X1.1
XOUT: R9.2 R10.2 U1.21 | length 255.3
  Top Layer w8: U1.21 4397.88,3446.97 4435.34,3409.51 R9.2 R10.2
pads on no net: LDO1.4 USB1.A8 USB1.B8

## Polygon pours and split planes (outlines as drawn)
GND on Top Layer (solid, remove dead copper, pour order 0): 3045,3904.85 5055,3904.85 cw(c5055,3859.85) 5100,3859.85 5100,3049.85 cw(c5055,3049.85) 5055,3004.85 3045,3004.85 cw(c3045,3049.85) 3000,3049.85 3000,3859.85 cw(c3045,3859.85)
GND on Bottom Layer (solid, remove dead copper, pour order 2): 3045,3904.85 5055,3904.85 cw(c5055,3859.85) 5100,3859.85 5100,3049.85 cw(c5055,3049.85) 5055,3004.85 3045,3004.85 cw(c3045,3049.85) 3000,3049.85 3000,3859.85 cw(c3045,3859.85)

## Keep-outs
Board Outline Layer:
  lines w10: 3000,3049.85 ccw(c3045,3049.85) 3045,3004.85 5055,3004.85 ccw(c5055,3049.85) 5100,3049.85 5100,3859.85 ccw(c5055,3859.85) 5055,3904.85 3045,3904.85 ccw(c3045,3859.85) 3000,3859.85 3000,3049.85

## Other copper
Top Layer:
  region net XIN: 4603.56,3359.57 4593.56,3347.57 4621.56,3347.57 4611.56,3359.57
  region net XIN: 4603.56,3300.13 4611.56,3300.13 4621.56,3312.13 4593.56,3312.13
  region net $1N4514: 4556.44,3550.13 4566.44,3562.13 4538.44,3562.13 4548.44,3550.13
  region net $1N4514: 4524.7,3575.85 4536.7,3565.85 4536.7,3593.85 4524.7,3583.85
  region net XIN: 4603.56,3371.98 4611.56,3371.98 4621.56,3383.98 4593.56,3383.98
  region net $1N4514: 4556.44,3537.72 4548.44,3537.72 4538.44,3525.72 4566.44,3525.72
  region net $1N27491: 4754.14,3515.62 4764.14,3527.62 4736.14,3527.62 4746.14,3515.62
  region net $1N12428: 3470.44,3277.35 3480.44,3283.75 3452.44,3283.75 3462.44,3277.35
  region net $1N12428: 3504,3301.55 3492,3311.35 3492,3283.75 3504,3293.55
  region net $1N12428: 3606,3301.55 3606,3293.55 3618,3283.75 3618,3311.35
  region net 3V3: 3774.21,3712.35 3751.71,3722.57 3751.71,3687.13 3774.21,3697.35
  region net 3V3: 3728.53,3664.63 3743.53,3664.63 3751.71,3687.13 3720.22,3687.13
  region net ADC_AVDD: 4014.42,3614.65 4037.05,3623.13 4019.22,3644.9 4010.73,3622.27
  region net ADC_AVDD: 4030.96,3670.57 4020.96,3658.57 4048.96,3658.57 4038.96,3670.57
  region net 3V3: 3492.54,3744.36 3484.17,3721.86 3515.92,3721.86 3507.54,3744.36
  region net ADC_VREF: 3587.24,3700.85 3587.24,3708.85 3575.24,3718.85 3575.24,3690.85
  region net ADC_VREF: 3947.77,3700.85 3959.77,3690.85 3959.77,3718.85 3947.77,3708.85
  region net ADC_AVDD: 4030.96,3675.84 4038.96,3675.84 4048.96,3687.84 4020.96,3687.84
  region net RUN: 3497.7,3531.55 3492,3541.35 3492,3513.75 3497.7,3523.55
  region net RUN: 3606,3531.55 3606,3523.55 3618,3513.75 3618,3541.35
  region net 3V3: 3770.2,3712.35 3770.2,3697.35 3792.7,3687.13 3792.7,3722.57
  region net VBUS: 3382.5,3344.85 3397.5,3344.85 3413.6,3359 3366.4,3359
  region net VSYS: 3382.5,3573.2 3366.4,3550.7 3413.6,3550.7 3397.5,3573.2
  region net XOUT: 4474,3437.38 4466,3437.38 4456,3425.38 4484,3425.38
  region net XOUT: 4441,3413.51 4441,3405.51 4453,3395.51 4453,3423.51
  region net XIN: 4441,3346.19 4453,3336.19 4453,3364.19 4441,3354.19
  region net XIN: 4474,3322.31 4484,3334.31 4456,3334.31 4466,3322.31
  region net XOUT: 4474,3472.31 4484,3484.31 4456,3484.31 4466,3472.31
  region net $1N4514: 4493.17,3577.02 4487.52,3582.68 4466.08,3575.38 4487.01,3556.72
  region net GPIO15: 5002.22,3140.23 4960.22,3150.29 4954.56,3144.63 4964.62,3102.63
  region net GPIO14: 4902.22,3140.23 4860.22,3150.29 4854.56,3144.63 4864.62,3102.63
  region net GPIO13: 4702.22,3140.23 4660.22,3150.29 4654.56,3144.63 4664.62,3102.63
  region net GPIO12: 4602.22,3140.23 4560.22,3150.29 4554.56,3144.63 4564.62,3102.63
  region net GPIO11: 4502.22,3140.23 4460.22,3150.29 4454.56,3144.63 4464.62,3102.63
  region net GPIO10: 4402.22,3140.23 4360.22,3150.29 4354.56,3144.63 4364.62,3102.63
  region net GPIO8: 4135.38,3102.63 4145.45,3144.63 4139.79,3150.29 4097.78,3140.23
  region net GPIO7: 4035.38,3102.63 4045.45,3144.63 4039.79,3150.29 3997.78,3140.23
  region net GPIO5: 3735.38,3102.63 3745.45,3144.63 3739.79,3150.29 3697.78,3140.23
  region net GPIO4: 3635.38,3102.63 3645.45,3144.63 3639.79,3150.29 3597.78,3140.23
  region net GPIO3: 3535.38,3102.63 3545.45,3144.63 3539.79,3150.29 3497.78,3140.23
  region net GPIO2: 3435.38,3102.63 3445.45,3144.63 3439.79,3150.29 3397.78,3140.23
  region net GPIO1: 3235.38,3102.63 3245.45,3144.63 3239.79,3150.29 3197.78,3140.23
  region net GPIO0: 3143.94,3143.13 3138.28,3148.78 3115.66,3140.3 3135.45,3120.5
  region net SWCLK: 4876.57,3531.42 4845,3508.85 4845,3500.85 4876.57,3478.27
  region net SWDIO: 4923.44,3378.27 4950,3400.85 4950,3408.85 4923.44,3431.42
  region net $1N7808: 4753.81,3399.08 4745.81,3399.08 4735.81,3387.08 4763.81,3387.08
  region net CC1: 3332.67,3500.06 3332.67,3508.06 3320.67,3509.96 3320.67,3498.15
  region net USB_DN: 3257.49,3488.38 3257.49,3480.38 3269.49,3478.47 3269.49,3490.28
  region net USB_DP: 3332.67,3468.69 3320.67,3470.59 3320.67,3458.78 3332.67,3460.69
  region net USB_DN: 3257.49,3441.01 3269.49,3439.1 3269.49,3450.91 3257.49,3449.01
  region net USB_DP: 3332.67,3421.32 3332.67,3429.32 3320.67,3431.22 3320.67,3419.41
  region net CC2: 3332.67,3381.95 3332.67,3389.95 3320.67,3391.85 3320.67,3380.04
  region net $1N43649: 3949.25,3522.86 3961.61,3517.59 3967.27,3523.24 3961.99,3535.6
  region net $1N43452: 3961.99,3469.1 3967.27,3481.45 3961.61,3487.11 3949.25,3481.83
  region net VSYS: 3399.01,3670.96 3397.5,3683.43 3382.5,3683.43 3381,3670.96
  region net VSYS: 3381,3655.08 3382.5,3642.61 3397.5,3642.61 3399.01,3655.08
  region net CC1: 3337.53,3513.06 3325.06,3508.06 3325.06,3500.06 3337.53,3495.05
  region net USB_DP: 3327.53,3434.32 3315.06,3429.32 3315.06,3421.32 3327.53,3416.31
  region net USB_DP: 3347.46,3424.57 3347.83,3432.02 3342.18,3437.68 3334.72,3437.3
  region net USB_DN: 3254.17,3462.79 3249.16,3474.85 3241.16,3474.85 3236.16,3462.79
  region net USB_DN: 3244.41,3442.86 3252.18,3442.18 3257.83,3447.84 3257.15,3455.6
  region net CC2: 3337.54,3394.96 3325.07,3389.95 3325.07,3381.95 3337.54,3376.95
  region net QSPI_SS: 3554.25,3242.86 3566.61,3237.59 3572.27,3243.24 3566.99,3255.6
  region net $1N12428: 3475.45,3285.29 3470.44,3297.51 3462.44,3297.51 3457.44,3285.29
  region net GPIO25: 4166.49,3545.31 4161.48,3557.78 4153.48,3557.78 4148.48,3545.31
  region net 3V3: 4069.72,3681.88 4074.74,3669.42 4082.74,3669.45 4087.73,3681.93
  region net 3V3: 4265.06,3563.85 4252.59,3558.85 4252.59,3550.85 4265.06,3545.84
  region net 1V1: 4086.56,3455.97 4074.08,3450.97 4074.07,3442.97 4086.53,3437.96
  region net 3V3: 4086.56,3487.47 4074.08,3482.47 4074.07,3474.47 4086.53,3469.46
  region net 1V1: 4096.55,3534.75 4084.08,3529.75 4084.08,3521.75 4096.55,3516.74
  region net 3V3: 3987.25,3549.95 3999.61,3544.67 4005.27,3550.33 3999.99,3562.69
  region net 1V1: 4420.76,3481.83 4414.21,3481.3 4408.56,3475.64 4408.02,3469.1
  region net $1N27491: 4759.1,3517.69 4754.14,3530.22 4746.14,3530.31 4741.09,3517.89
  region net $1N7808: 4740.8,3398.76 4745.81,3386.29 4753.81,3386.29 4758.81,3398.76
  region net RUN: 3562.95,3518.54 3575.42,3523.55 3575.42,3531.55 3562.95,3536.55
  region net RUN: 3547.06,3536.55 3534.59,3531.55 3534.59,3523.55 3547.06,3518.54
  region net 3V3: 3745.03,3490.77 3743.53,3503.25 3728.53,3503.28 3727.01,3490.81
  region net 3V3: 4225.87,3206.69 4224.47,3222.39 4216.47,3227.5 4210.69,3216.39
  region net 3V3: 4123.89,3363.85 4111.42,3358.85 4111.42,3350.85 4123.89,3345.84
  region net GPIO23: 4149.25,3767.86 4161.61,3762.59 4167.27,3768.24 4161.99,3780.6
  region net GND: 4282.01,3387.79 4277,3400.26 4269,3400.26 4264,3387.79
  region net VBUS: 3140.76,3753.49 3151.36,3764.1 3135.45,3806.52 3098.33,3769.4
  region net VSYS: 3197.78,3769.47 3237.31,3756.93 3247.92,3767.54 3235.38,3807.07
  region net 3V3: 3473.44,3781.37 3492.54,3744.57 3507.54,3744.59 3526.62,3781.43
  region net ADC_VREF: 3573.42,3781.4 3596,3744.85 3604,3744.85 3626.59,3781.4
  region net GPIO28_ADC2: 3697.78,3769.47 3739.79,3759.41 3745.45,3765.06 3735.38,3807.07
  region net GPIO27_ADC1: 3897.78,3769.47 3939.79,3759.41 3945.45,3765.06 3935.38,3807.07
  region net GPIO26_ADC0: 3997.78,3769.47 4039.79,3759.41 4045.45,3765.06 4035.38,3807.07
  region net RUN: 4126.59,3828.3 4104,3860.85 4096,3860.85 4073.42,3828.3
  region net GPIO22: 4176.78,3778.06 4200.73,3744.14 4208.73,3745.21 4229.48,3785.16
  region net GPIO21: 4364.62,3807.07 4354.56,3765.06 4360.22,3759.41 4402.22,3769.47
  region net GPIO20: 4464.62,3807.07 4454.56,3765.06 4460.22,3759.41 4502.22,3769.47
  region net GPIO19: 4564.62,3807.07 4554.56,3765.06 4560.22,3759.41 4602.22,3769.47
  region net GPIO18: 4664.62,3807.07 4654.56,3765.06 4660.22,3759.41 4702.22,3769.47
  region net GPIO16: 4964.62,3807.07 4954.56,3765.06 4960.22,3759.41 5002.22,3769.47
  region net GPIO17: 4864.62,3807.07 4854.56,3765.06 4860.22,3759.41 4902.22,3769.47
Bottom Layer:
  region net 3V3: 4892.46,3189.81 4907.46,3189.81 4915.71,3192.13 4884.22,3192.13
  region net 3V3: 4892.46,3250.07 4884.22,3227.57 4915.71,3227.57 4907.46,3250.07
  region net GPIO25: 4721,3306.19 4733,3296.19 4733,3324.19 4721,3314.19
  region net $1N7808: 4753.81,3397.38 4745.81,3397.38 4735.81,3385.38 4763.81,3385.38
  region net 3V3: 3679.75,3580.75 3679.75,3595.75 3675.87,3600.06 3675.87,3576.44
  region net VSYS: 3511.63,3670.54 3511.63,3655.54 3534.13,3651.24 3534.13,3674.86
  region net VSYS: 3591.8,3670.55 3573.5,3674.86 3573.5,3651.24 3591.81,3655.55
  region net VSYS: 3593.4,3580.75 3593.4,3595.75 3573.5,3600.06 3573.5,3576.44
  region net VSYS: 3449.79,3670.52 3449.79,3655.52 3472.29,3647.27 3472.29,3678.77
  region net VSYS: 3530.22,3670.54 3507.72,3678.77 3507.72,3647.27 3530.22,3655.54
  region net 3V3: 3817.44,3614.79 3807.72,3623.04 3807.72,3591.54 3817.44,3599.79
  region net 3V3: 3749.79,3614.79 3749.79,3599.79 3772.29,3591.54 3772.29,3623.04
  region net 3V3: 4180.22,3670.52 4157.72,3678.77 4157.72,3647.27 4180.22,3655.52
  region net 3V3: 4118.17,3670.52 4118.17,3655.52 4122.29,3647.27 4122.29,3678.77
  region net 3V3: 4147.5,3701.27 4132.5,3701.27 4122.29,3678.77 4157.72,3678.77
  region net 3V3: 4170.29,3670.52 4170.29,3655.52 4192.79,3647.27 4192.79,3678.77
  region net 3V3: 4240.22,3667.02 4228.22,3677.02 4228.22,3649.02 4240.22,3659.02
  region net $1N12428: 3462.44,3277.35 3452.44,3271.86 3480.44,3271.86 3470.44,3277.35
  region net 3V3: 4300.25,3493.64 4300.25,3485.64 4312.25,3475.64 4312.25,3503.64
  region net 3V3: 4332,3519.35 4324,3519.35 4314,3507.35 4342,3507.35
  region net 3V3: 4235.25,3258.85 4235.25,3250.85 4247.25,3240.85 4247.25,3268.85
  region net 3V3: 4270.5,3214.63 4278.74,3237.13 4247.25,3237.13 4255.5,3214.63
  region net 1V1: 4104.7,3423.85 4104.7,3415.85 4116.7,3405.85 4116.7,3433.85
  region net 1V1: 4128.44,3449.57 4118.44,3437.57 4146.44,3437.57 4136.44,3449.57
  region net 1V1: 4410,3423.85 4399.47,3433.85 4399.47,3405.85 4410,3415.85
  region net 1V1: 4387.73,3390.13 4397.73,3402.13 4369.73,3402.13 4379.73,3390.13
  region net 3V3: 4010.73,3524.91 4010.73,3539.91 4005.72,3548.16 4005.72,3516.66
  region net 3V3: 3984,3560.16 3974,3548.16 4002,3548.16 3992,3560.16
  region net 1V1: 4128.44,3516.65 4118.44,3507.35 4146.44,3507.35 4136.44,3516.65
  region net 1V1: 4128.44,3459.92 4136.44,3459.92 4146.44,3471.92 4118.44,3471.92
  region net 3V3: 4757.5,3642.88 4742.5,3642.88 4733,3620.38 4767.01,3620.38
  region net $1N27491: 4754,3517.31 4764,3529.31 4736,3529.31 4746,3517.31
  region net 3V3: 3637.16,3215.34 3652.16,3215.34 3660.54,3237.84 3628.79,3237.84
  region net $1N30099: 3951.04,3659.02 3951.04,3667.02 3939.04,3677.02 3939.04,3650.53
  region net $1N30099: 3893.02,3670.41 3893.02,3662.41 3905.02,3652.41 3905.02,3680.41
  region net VSYS: 3852.5,3581.48 3867.5,3581.48 3877.01,3591.21 3843,3591.21
  region net $1N30099: 3889.01,3670.41 3877.01,3680.41 3877.01,3652.41 3889.01,3662.41
  region net $1N30099: 4034.31,3652.73 4028.27,3640.73 4048.35,3640.73 4042.31,3652.73
  region net 3V3: 4107.69,3660.03 4099.53,3660.41 4099.53,3644.66 4107.69,3645.03
  region net 3V3: 4085.49,3672.41 4079.45,3660.41 4099.53,3660.41 4093.49,3672.41
  region net GPIO29_ADC3: 4090.49,3593.29 4098.49,3593.29 4099.53,3605.29 4080.49,3605.29
  region net VSYS: 3390,3670.52 3390,3655.52 3402.29,3647.27 3402.29,3678.77
  region net VSYS: 3460.22,3670.52 3437.72,3678.77 3437.72,3647.27 3460.22,3655.52
  region net 3V3: 3698.79,3599.79 3702.29,3591.54 3702.29,3623.04 3698.79,3614.79
  region net 3V3: 3760.22,3614.79 3737.72,3623.04 3737.72,3591.54 3760.22,3599.79
  region net $1N30099: 3958.29,3659.02 3970.29,3649.02 3970.29,3677.02 3958.29,3667.02
  region net $1N30099: 4017.72,3659.02 4017.72,3667.02 4005.72,3677.02 4005.72,3649.02
  region net 3V3: 4892.46,3246.92 4907.46,3246.92 4926.21,3269.42 4873.71,3269.42
  region net USB_DP: 3861.34,3440.84 3869.34,3440.84 3879.34,3452.84 3851.34,3452.84
  region net $1N43452: 3950,3465.85 3950,3473.85 3940.54,3483.85 3940.54,3455.85
  region net USB_DN: 3843,3538.85 3843,3530.85 3849.47,3520.85 3849.47,3548.85
  region net $1N43649: 3950,3530.85 3950,3538.85 3940.54,3548.85 3940.54,3520.85
  region net CC1: 3341.47,3514.42 3349.47,3514.42 3359.47,3526.42 3331.47,3526.42
  region net CC2: 3349.54,3385.43 3341.54,3385.43 3331.54,3373.43 3359.54,3373.43
  region net 3V3: 4076.58,3508.18 4084.21,3511.86 4075.72,3534.49 4053.95,3516.66
  region net 3V3: 4039.28,3524.91 4040.29,3516.66 4040.29,3548.16 4039.28,3539.91
  region net RUN: 3544.22,3478.85 3544.22,3486.85 3532.22,3496.85 3532.22,3468.85
  region net 3V3: 3683.04,3490.35 3660.54,3499.86 3660.54,3465.84 3683.04,3475.35
  region net RUN: 3562.56,3486.85 3562.56,3478.85 3569.47,3468.85 3569.47,3496.85
  region net 3V3: 4093.59,3262.35 4093.59,3247.35 4116.09,3237.13 4116.09,3272.57
  region net 3V3: 4139.33,3295.07 4124.33,3295.07 4116.09,3272.57 4147.58,3272.57
  region net $1N43649: 3942.06,3543.85 3929.59,3538.85 3929.59,3530.85 3942.06,3525.84
  region net $1N43452: 3942.06,3478.85 3929.59,3473.85 3929.59,3465.85 3942.06,3460.84
  region net VSYS: 3397.95,3654.01 3410.42,3655.52 3410.42,3670.52 3397.95,3672.02
  region net GPIO29_ADC3: 4103.5,3565.31 4098.49,3577.78 4090.49,3577.78 4085.49,3565.31
  region net CC1: 3354.48,3512 3349.47,3524.47 3341.47,3524.47 3336.47,3512
  region net USB_DP: 3343.42,3416.31 3355.89,3421.32 3355.89,3429.32 3343.42,3434.32
  region net USB_DN: 3253.11,3445.84 3265.58,3450.85 3265.58,3458.85 3253.11,3463.85
  region net CC2: 3336.52,3377.96 3341.54,3365.52 3349.54,3365.56 3354.53,3378.06
  region net $1N12428: 3457.44,3269.41 3462.44,3256.94 3470.44,3256.94 3475.45,3269.41
  region net GPIO25: 4165.42,3528.37 4177.89,3533.37 4177.89,3541.37 4165.42,3546.38
  region net 3V3: 4077.95,3677.86 4086.67,3676.23 4092.32,3681.89 4090.69,3690.6
  region net 3V3: 4282.01,3562.79 4277,3575.26 4269,3575.26 4264,3562.79
  region net 1V1: 4085.49,3439.01 4090.49,3426.54 4098.49,3426.54 4103.5,3439.01
  region net 3V3: 4103.5,3486.39 4098.49,3495.92 4090.49,3495.92 4085.49,3486.39
  region net 1V1: 4112.43,3516.74 4123.34,3521.75 4123.34,3529.75 4112.43,3534.75
  region net 3V3: 3979,3553.99 3984,3541.52 3992,3541.52 3997.01,3553.99
  region net 3V3: 4292.01,3470.66 4287,3482.85 4279,3482.85 4274,3470.66
  region net 1V1: 4411,3461.91 4416,3449.44 4424,3449.44 4429.01,3461.91
  region net $1N27491: 4759.01,3517.79 4754,3530.26 4746,3530.26 4741,3517.79
  region net $1N7808: 4740.8,3398.76 4745.81,3386.29 4753.81,3386.29 4758.81,3398.76
  region net RUN: 3546,3519.61 3551,3507.14 3559,3507.14 3564.01,3519.61
  region net 3V3: 3728.06,3491.85 3715.59,3490.35 3715.59,3475.35 3728.06,3473.84
  region net 3V3: 4223.01,3212.79 4218,3225.26 4210,3225.26 4205,3212.79
  region net 3V3: 4122.83,3346.91 4124.33,3334.44 4139.33,3334.44 4140.84,3346.91
  region net GPIO23: 4159.01,3787.79 4154,3800.26 4146,3800.26 4141,3787.79
  region net 3V3: 3838.5,3712.79 3836.99,3719.34 3821.99,3719.34 3820.49,3712.79
  region net 3V3: 3820.49,3696.9 3822,3684.43 3837,3684.44 3838.5,3696.91
  region net GPIO23: 3426.59,3828.3 3404,3859.85 3396,3859.85 3373.42,3828.3
  region net 3V3: 3473.42,3781.4 3492.5,3749.85 3507.5,3749.85 3526.59,3781.4

## Silkscreen, mask and mechanical layers (free items; w line width, h text height)
Top Silkscreen Layer:
  text "VBUS" at 3025,3851.31 h47.24
  text "VSY" at 3155.52,3851.31 h47.24
  text "GND" at 3255,3851.31 h47.24
  text "3V3" at 3456.04,3851.31 h47.24
  text "VREF" at 3541.04,3851.31 h47.24
  text "GND" at 3751.04,3851.31 h47.24
  text "RUN" at 4051.19,3851.31 h47.24
  text "GND" at 4248.04,3851.31 h47.24
  text "GND" at 4749.61,3851.31 h47.24
  text "P23" at 3361.04,3850 h50
  text "P28" at 3666.04,3850 h50
  text "P27" at 3861.04,3850 h50
  text "P26" at 3961.04,3850 h50
  text "P22" at 4161.04,3850 h50
  text "P21" at 4360,3849.85 h50
  text "P20" at 4461.04,3850 h50
  text "P19" at 4561.04,3850 h50
  text "P18" at 4661.04,3850 h50
  text "P17" at 4861.04,3850 h50
  text "P16" at 4961.04,3850 h50
  text "PWR" at 4697,3631.85 h50
  text "GND" at 4965,3569.85 h59.06
  text "CLK" at 4968.79,3469.85 h59.06
  text "RESET" at 3480,3439.85 h50
  text "DIO" at 4974.66,3369.81 h59.06
  text "3V3" at 4976.02,3269.81 h59.06
  text "GP25" at 4695,3226.23 h50
  text "BOOTSEL" at 3455,3206.35 h50
  text "GND" at 3250,3001.7 h47.24
  text "GND" at 3747.64,3001.7 h47.24
  text "GND" at 4248.04,3001.7 h47.24
  text "GND" at 4749.61,3001.7 h47.24
  text "P00" at 3061.04,3000 h50
  text "P01" at 3161.04,3000 h50
  text "P02" at 3361.04,3000 h50
  text "P03" at 3461.04,3000 h50
  text "P04" at 3561.04,3000 h50
  text "P05" at 3661.04,3000 h50
  text "P06" at 3861.04,3000 h50
  text "P07" at 3961.04,3000 h50
  text "P08" at 4061.04,3000 h50
  text "P09" at 4161.04,3000 h50
  text "P10" at 4361.04,3000 h50
  text "P11" at 4461.04,3000 h50
  text "P12" at 4561.04,3000 h50
  text "P13" at 4661.04,3000 h50
  text "P14" at 4861.04,3000 h50
  text "P15" at 4961.04,3000 h50
Bottom Silkscreen Layer:
  text "GND" at 5074.96,3569.81 h59.06
  text "CLK" at 5070.8,3469.81 h59.06
  text "DIO" at 5064.3,3369.85 h59.06
  text "3V3" at 5062.8,3269.85 h59.06